# EAGLE board BrainSide (EAGLE 6.5.0)
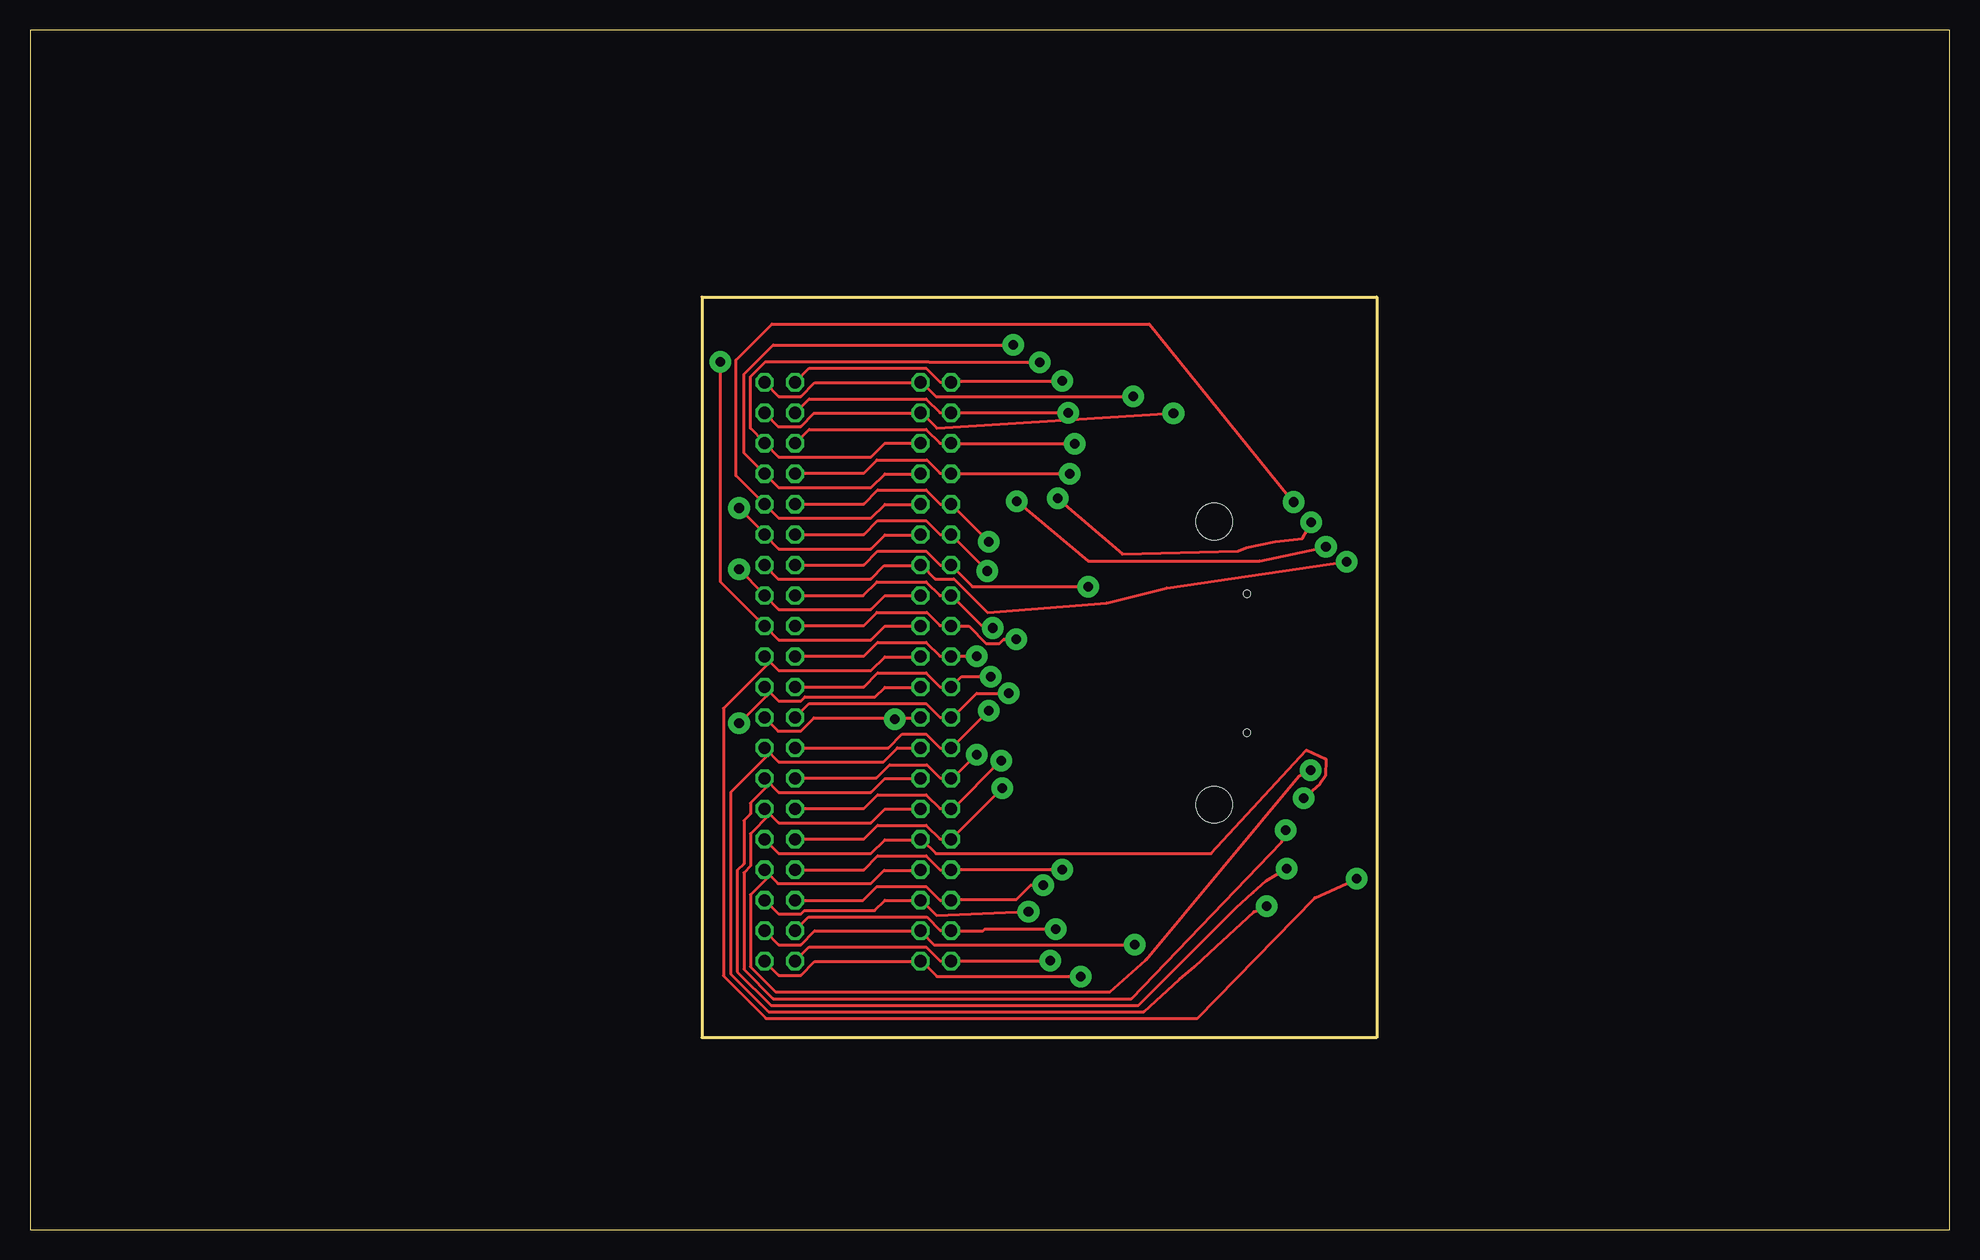
[diagram p0: board, top side]
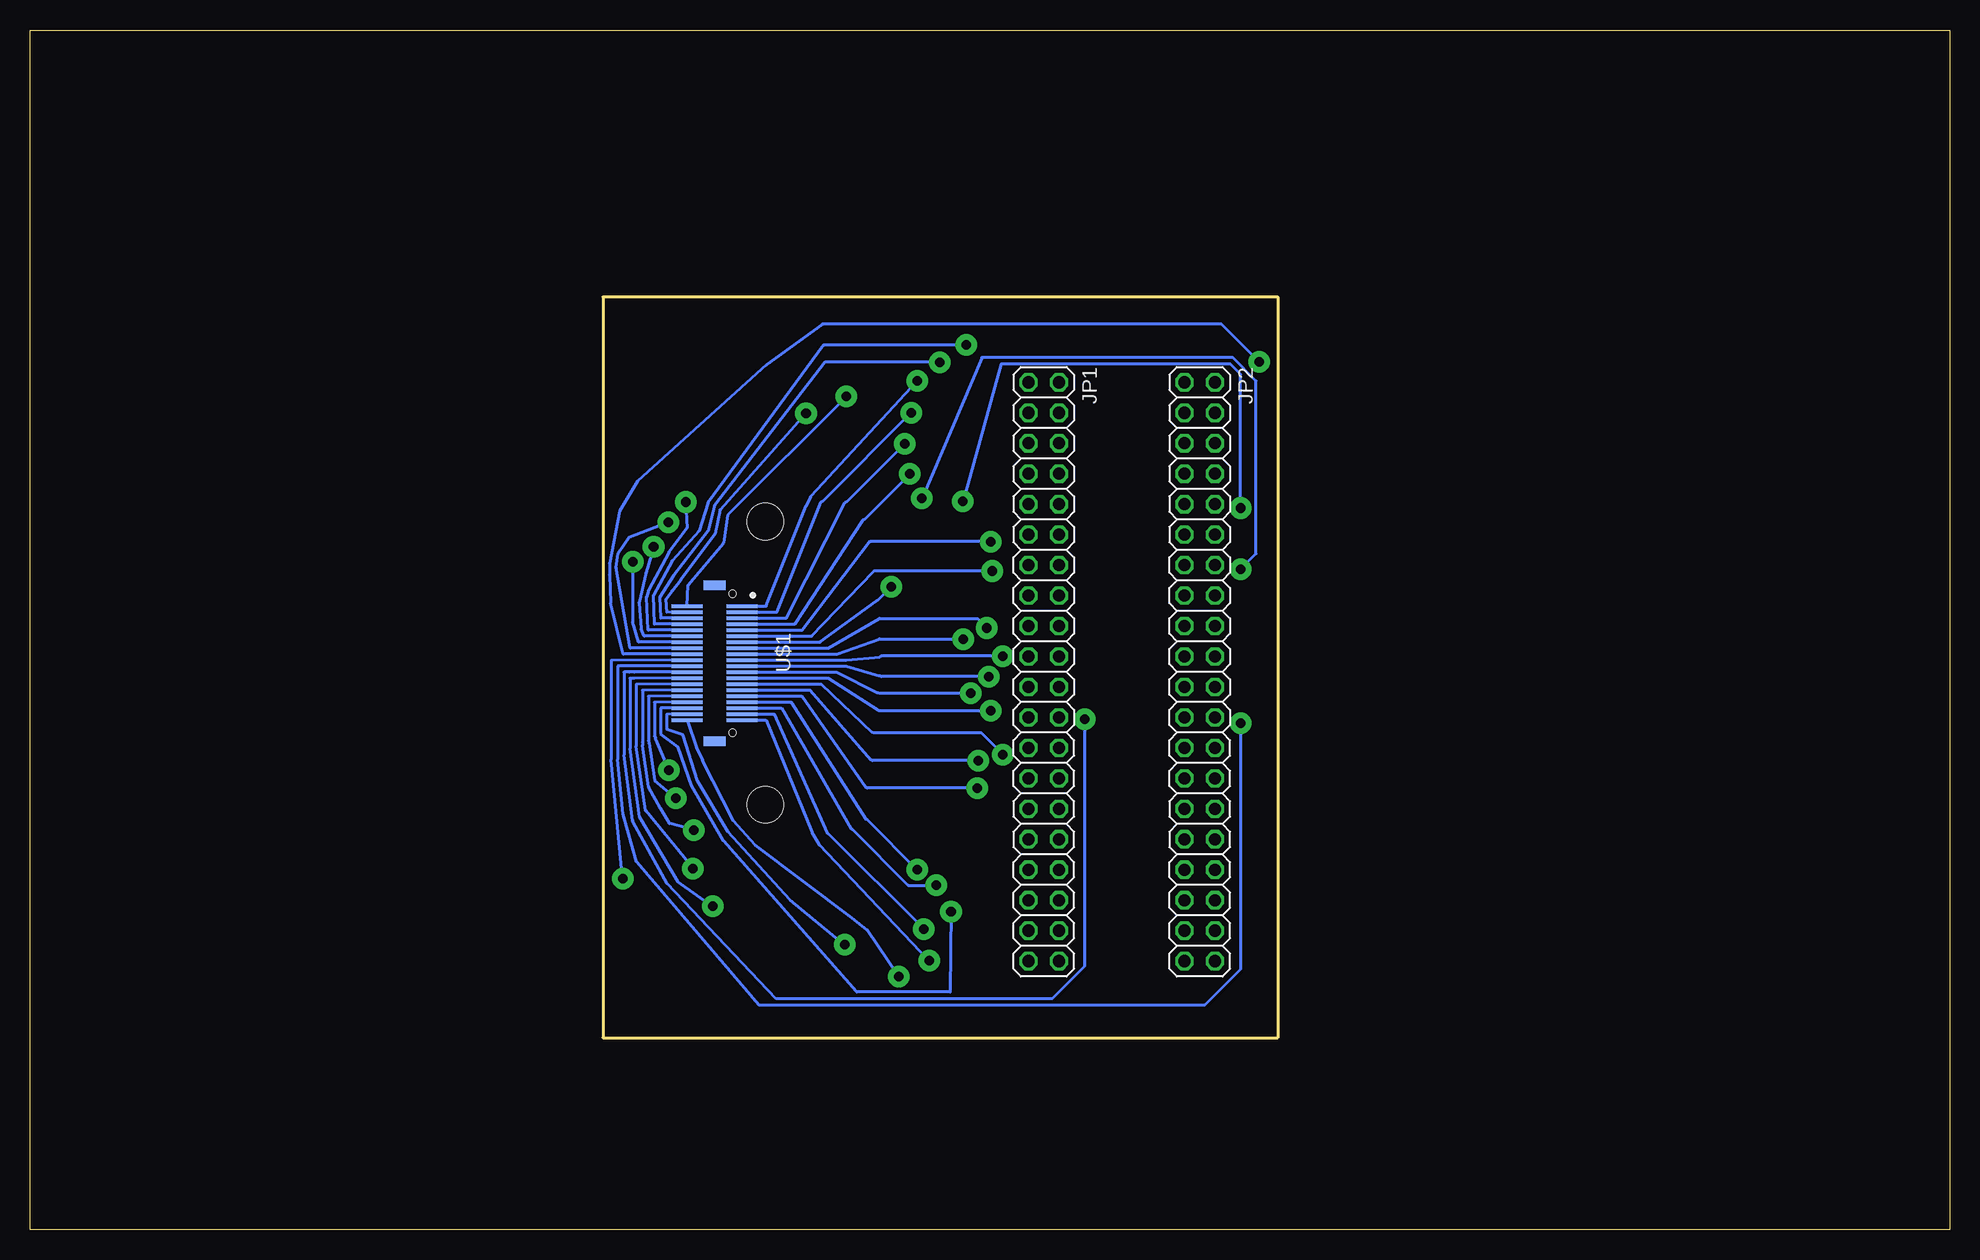
[diagram p1: board, bottom side, seen from below]

Size 160 x 100 mm. Coordinates in mm from the lower left corner, seen from the top.
Outline: 0,0 160,0 160,100 0,100 0,0
Outline: 56,77.75 56,16 112.25,16 112.25,77.75 56,77.75
Copper layers (1*16): Top 0.035mm / dielectric 1.5mm / Bottom 0.035mm
Design rules "default *": minimum track width 10mil, minimum drill 0.8mm, track to track 0.25mm, track to pad 0.25mm, pad to pad 0.25mm, via to via 0.25mm, smd to smd 0.25mm, copper to edge 40mil, drill to drill 8mil, minimum pad ring 10mil, minimum via ring 0.5mm, stop-mask expansion 4mil, vias tented up to drill 0mil, thermal gap 10mil
bRestrict: area 60,21 to 65,72; area 73,21.2 to 78,71.8

## Footprints (pad centres in the part's own frame; a part is rotated, then mirrored left to right if it is on the bottom)
2X20 = drill 1.016 octagon: 1 -24.13,-1.27; 2 -24.13,1.27; 3 -21.59,-1.27; 4 -21.59,1.27; 5 -19.05,-1.27; 6 -19.05,1.27; 7 -16.51,-1.27; 8 -16.51,1.27; 9 -13.97,-1.27; 10 -13.97,1.27; 11 -11.43,-1.27; 12 -11.43,1.27; 13 -8.89,-1.27; 14 -8.89,1.27; 15 -6.35,-1.27; 16 -6.35,1.27; 17 -3.81,-1.27; 18 -3.81,1.27; 19 -1.27,-1.27; 20 -1.27,1.27; 21 1.27,-1.27; 22 1.27,1.27; 23 3.81,-1.27; 24 3.81,1.27; 25 6.35,-1.27; 26 6.35,1.27; 27 8.89,-1.27; 28 8.89,1.27; 29 11.43,-1.27; 30 11.43,1.27; 31 13.97,-1.27; 32 13.97,1.27; 33 16.51,-1.27; 34 16.51,1.27; 35 19.05,-1.27; 36 19.05,1.27; 37 21.59,-1.27; 38 21.59,1.27; 39 24.13,-1.27; 40 24.13,1.27
DF12_F = smd 0.3 x 2.6: P$1 -4.75,2.3; P$2 -4.75,-2.3; P$3 -4.25,2.3; P$4 -4.25,-2.3; P$5 -3.75,2.3; P$6 -3.75,-2.3; P$7 -3.25,2.3; P$8 -3.25,-2.3; P$9 -2.75,2.3; P$10 -2.75,-2.3; P$11 -2.25,2.3; P$12 -2.25,-2.3; P$13 -1.75,2.3; P$14 -1.75,-2.3; P$15 -1.25,2.3; P$16 -1.25,-2.3; P$17 -0.75,2.3; P$18 -0.75,-2.3; P$19 -0.25,2.3; P$20 -0.25,-2.3; P$21 0.25,2.3; P$22 0.25,-2.3; P$23 0.75,2.3; P$24 0.75,-2.3; P$25 1.25,2.3; P$26 1.25,-2.3; P$27 1.75,2.3; P$28 1.75,-2.3; P$29 2.25,2.3; P$30 2.25,-2.3; P$31 2.75,2.3; P$32 2.75,-2.3; P$33 3.25,2.3; P$34 3.25,-2.3; P$35 3.75,2.3; P$36 3.75,-2.3; P$37 4.25,2.3; P$38 4.25,-2.3; P$39 4.75,2.3; P$40 4.75,-2.3 | smd 0.8 x 1.8: P$41 -6.5,0; P$42 6.5,0 | hole 0.6: -5.8,1.5; 5.8,1.5 | hole 3.048: -11.8,4.24; 11.8,4.24

## Placement (x,y rotation side)
JP1  [2X20]  75.5,46.5 270 bottom
JP2  [2X20]  62.5,46.5 270 bottom
U$1  DF12_F  [DF12_F]  102.94,47.21 270 bottom

## Library data of the parts
JP1 JP2 = pinhead
U$1 = KW2

## Nets
N$1: JP1.39 JP2.39 U$1.P$39
N$2: JP1.37 JP2.37 U$1.P$37
N$3: JP1.35 JP2.35 U$1.P$35
N$4: JP1.33 JP2.33 U$1.P$33
N$5: JP1.31 JP2.31 U$1.P$31
N$6: JP1.29 JP2.29 U$1.P$29
N$7: JP1.27 JP2.27 U$1.P$27
N$8: JP1.25 JP2.25 U$1.P$25
N$9: JP1.23 JP2.23 U$1.P$23
N$10: JP1.21 JP2.21 U$1.P$21
N$11: JP1.19 JP2.19 U$1.P$19
N$12: JP1.17 JP2.17 U$1.P$17
N$13: JP1.15 JP2.15 U$1.P$15
N$14: JP1.13 JP2.13 U$1.P$13
N$15: JP1.11 JP2.11 U$1.P$11
N$16: JP1.9 JP2.9 U$1.P$9
N$17: JP1.7 JP2.7 U$1.P$7
N$18: JP1.5 JP2.5 U$1.P$5
N$19: JP1.3 JP2.3 U$1.P$3
N$20: JP1.1 JP2.1 U$1.P$1
N$21: JP1.2 JP2.2 U$1.P$2
N$22: JP1.4 JP2.4 U$1.P$4
N$23: JP1.6 JP2.6 U$1.P$6
N$24: JP1.8 JP2.8 U$1.P$8
N$25: JP1.10 JP2.10 U$1.P$10
N$26: JP1.12 JP2.12 U$1.P$12
N$27: JP1.14 JP2.14 U$1.P$14
N$28: JP1.16 JP2.16 U$1.P$16
N$29: JP1.18 JP2.18 U$1.P$18
N$30: JP1.20 JP2.20 U$1.P$20
N$31: JP1.22 JP2.22 U$1.P$22
N$32: JP1.24 JP2.24 U$1.P$24
N$33: JP1.26 JP2.26 U$1.P$26
N$34: JP1.28 JP2.28 U$1.P$28
N$35: JP1.30 JP2.30 U$1.P$30
N$36: JP1.32 JP2.32 U$1.P$32
N$37: JP1.34 JP2.34 U$1.P$34
N$38: JP1.36 JP2.36 U$1.P$36
N$39: JP1.38 JP2.38 U$1.P$38
N$40: JP1.40 JP2.40 U$1.P$40

## Tracks (layer width: path | path; a pad name or v marks a point on that pad's centre or on a via)
N$1  (via drill 0.8)
  Top 0.254: JP2.39 64.95,23.55 74.7,23.55 75.85,22.4 76.75,22.4 JP1.39 76.9,22.4 v85.05,22.4
  Bottom 0.254: U$1.P$39 98.66,42.46 94.8,33.1 94.2,32.05 v85.05,22.4
N$2  (via drill 0.8)
  Top 0.254: JP2.37 63.8,24.95 64.9,26.05 74.75,26.05 75.85,24.95 76.75,24.95 JP1.37 76.9,24.9 79.45,24.9 79.6,25.05 v85.5,25.05
  Bottom 0.254: U$1.P$37 97.96,42.96 93.55,33.05 93.45,33 v85.5,25.05
N$3  (via drill 0.8)
  Top 0.254: JP2.35 69.45,27.45 70.6,28.6 74.7,28.6 75.85,27.45 JP1.35 76.85,27.5 82.2,27.5 83.4,28.7 v84.45,28.7
  Bottom 0.254: U$1.P$35 97.36,43.46 91.55,33.4 91.45,33.35 86.8,28.7 v84.45,28.7
N$4  (via drill 0.8)
  Top 0.254: JP2.33 63.8,30 69.5,30 70.65,31.15 74.7,31.15 75.85,30 76.75,30 JP1.33 76.9,30 v86.05,30
  Bottom 0.254: U$1.P$33 96.56,43.96 90.3,34.2 90.2,34.15 v86.05,30
N$5  (via drill 0.8)
  Top 0.254: JP2.31 63.8,32.55 69.5,32.55 70.65,33.7 74.7,33.7 75.85,32.55 76.75,32.55 JP1.31 76.85,32.6 v81.05,36.8
  Bottom 0.254: U$1.P$31 95.66,44.46 90.3,36.85 90.2,36.8 v81.05,36.8
N$6  (via drill 0.8)
  Top 0.254: JP2.29 63.8,35.1 69.5,35.1 70.65,36.25 74.7,36.25 75.85,35.1 76.75,35.1 JP1.29 76.85,35 v80.95,39.1
  Bottom 0.254: U$1.P$29 94.96,44.96 89.9,39.15 89.8,39.1 v80.95,39.1
N$7  (via drill 0.8)
  Top 0.254: JP2.27 63.8,37.65 70.55,37.65 71.65,38.75 74.75,38.75 75.85,37.65 76.75,37.65 JP1.27 76.9,37.6 v78.9,39.6
  Bottom 0.254: U$1.P$27 94.06,45.46 89.8,41.45 89.7,41.4 80.7,41.4 v78.9,39.6
N$8  (via drill 0.8)
  Top 0.254: JP2.25 71.55,40.15 72.7,41.3 74.7,41.3 75.85,40.15 JP1.25 76.85,40.2 v79.9,43.25
  Bottom 0.254: U$1.P$25 93.46,45.96 89.3,43.3 89.2,43.25 v79.9,43.25
N$9  (via drill 0.8)
  Top 0.254: JP2.23 63.8,42.7 64.95,43.85 74.7,43.85 75.85,42.7 76.75,42.7 JP1.23 76.9,42.7 78.9,44.7 v81.6,44.7
  Bottom 0.254: U$1.P$23 92.76,46.46 89.3,44.75 89.2,44.7 v81.6,44.7
N$10  (via drill 0.8)
  Top 0.254: JP2.21 63.8,45.25 69.5,45.25 70.65,46.4 74.7,46.4 75.85,45.25 76.75,45.25 JP1.21 76.85,45.3 77.65,46.1 v80.1,46.1
  Bottom 0.254: U$1.P$21 91.96,46.96 89.15,46.15 89.05,46.1 v80.1,46.1
N$11  (via drill 0.8)
  Top 0.254: JP2.19 63.8,47.8 69.5,47.8 70.65,48.95 74.7,48.95 75.85,47.8 76.75,47.8 JP1.19 76.9,47.8 v78.9,47.8
  Bottom 0.254: U$1.P$19 91.94,47.46 89.15,47.75 89.05,47.8 v78.9,47.8
N$12  (via drill 0.8)
  Top 0.254: JP2.17 63.8,50.35 69.5,50.35 70.6,51.45 74.75,51.45 75.85,50.35 76.75,50.35 JP1.17 76.9,50.3 78.25,50.3 79.7,48.85 80.8,48.85 81.15,49.2 v82.2,49.2
  Bottom 0.254: U$1.P$17 92.74,47.96 89.2,49.25 89.1,49.2 v82.2,49.2
N$13  (via drill 0.8)
  Top 0.254: JP2.15 69.45,52.85 70.6,54 74.7,54 75.85,52.85 JP1.15 76.85,52.8 79.5,50.15 v80.25,50.15
  Bottom 0.254: U$1.P$15 93.44,48.46 89.2,50.95 89.1,50.9 81,50.9 v80.25,50.15
N$14  (via drill 0.8)
  Top 0.254: JP2.13 63.8,55.4 69.5,55.4 70.65,56.55 74.7,56.55 75.85,55.4 76.75,55.4 JP1.13 76.85,55.3 78.55,53.6 v88.2,53.6
  Bottom 0.254: U$1.P$13 94.14,48.96 89.45,52.4 89.35,52.45 v88.2,53.6
N$15  (via drill 0.8)
  Top 0.254: JP2.11 63.8,57.95 69.5,57.95 70.65,59.1 74.7,59.1 75.85,57.95 76.75,57.95 JP1.11 v79.8,54.9
  Bottom 0.254: U$1.P$11 94.84,49.46 89.7,54.85 89.6,54.9 v79.8,54.9
N$16  (via drill 0.8)
  Top 0.254: JP2.9 63.8,60.5 69.5,60.5 70.65,61.65 74.7,61.65 75.85,60.5 76.75,60.5 JP1.9 76.85,60.4 v79.9,57.35
  Bottom 0.254: U$1.P$9 95.64,49.96 90.05,57.3 89.95,57.35 v79.9,57.35
N$17  (via drill 0.8)
  Top 0.254: JP2.7 63.8,63.05 69.5,63.05 70.6,64.15 74.75,64.15 75.85,63.05 76.75,63.05 JP1.7 76.9,63 v86.65,63
  Bottom 0.254: U$1.P$7 96.24,50.46 90.55,59.15 90.45,59.2 v86.65,63
N$18  (via drill 0.8)
  Top 0.254: JP2.5 63.8,65.55 64.95,66.7 74.7,66.7 75.85,65.55 JP1.5 76.85,65.5 v87.1,65.5
  Bottom 0.254: U$1.P$5 96.94,50.96 92.05,60.6 91.95,60.65 v87.1,65.5
N$19  (via drill 0.8)
  Top 0.254: JP2.3 63.8,68.1 64.95,69.25 74.7,69.25 75.85,68.1 76.75,68.1 JP1.3 76.9,68.1 v86.55,68.1
  Bottom 0.254: U$1.P$3 97.74,51.46 94.05,60.65 93.95,60.7 v86.55,68.1
N$20  (via drill 0.8)
  Top 0.254: JP2.1 63.8,70.65 64.95,71.8 74.7,71.8 75.85,70.65 76.75,70.65 JP1.1 76.8,70.75 v86.05,70.75
  Bottom 0.254: U$1.P$1 98.64,51.96 95.3,60.3 94.95,61.1 v86.05,70.75
N$21  (via drill 0.8)
  Top 0.254: JP2.2 61.25,70.6 62.4,69.45 64.25,69.45 65.4,70.6 74.2,70.6 JP1.2 74.35,70.6 75.5,69.45 v91.95,69.45
  Bottom 0.254: U$1.P$2 105.16,53.71 102.2,57.25 101.85,59.55 v91.95,69.45
N$22  (via drill 0.8)
  Top 0.254: JP2.4 61.25,68.05 62.35,66.95 64.25,66.95 65.35,68.05 74.2,68.05 JP1.4 74.35,68.05 75.6,66.8 v95.31,68.04
  Bottom 0.254: U$1.P$4 106.91,51.44 106.97,52.58 106.5,53.25 105.75,54.2 102.9,58 102.5,60 v95.31,68.04
N$23  (via drill 0.8)
  Top 0.254: JP1.6 71.25,65.55 70.1,64.4 62.4,64.4 61.25,65.55 JP2.6 61.2,65.65 60.05,66.8 60.05,71.1 61.3,72.35 74.9,72.35 74.95,72.3 v84.15,72.3
  Bottom 0.254: U$1.P$6 107.4,50.96 107.49,52.74 106.32,54.56 103.5,58.25 102.95,60.35 93.75,72.3 v84.15,72.3
N$24  (via drill 0.8)
  Top 0.254: JP1.8 74.2,63 71.25,63 70.1,61.85 62.4,61.85 61.25,63 JP2.8 61.15,63.1 59.5,64.75 59.5,71.3 61.95,73.75 v81.95,73.75
  Bottom 0.254: U$1.P$8 107.94,50.47 108.03,52.88 106.5,55.75 104.25,58.25 103.5,60.6 93.85,73.75 v81.95,73.75
N$25  (via drill 0.8)
  Top 0.254: JP1.10 74.2,60.45 71.25,60.45 70.1,59.3 62.4,59.3 JP2.10 58.85,62.85 58.85,72.5 61.85,75.5 93.3,75.5 104.9,61.15 v105.35,60.65
  Bottom 0.254: U$1.P$10 108.46,49.96 108.61,52.74 108.45,53.3 106.75,56.5 105.25,58.5 v105.35,60.65
N$26  (via drill 0.8)
  Top 0.254: JP1.12 74.2,57.9 71.25,57.9 70.1,56.75 62.4,56.75 61.25,57.9 JP2.12 61.2,58.05 v59.1,60.15 | v108.02,56.9 102.5,55.75 88.2,55.75 v82.25,60.7
  Bottom 0.254: U$1.P$12 108.81,49.46 109.05,50.09 109.25,52.25 108.65,54.76 v108.02,56.9 | v82.25,60.7 79.05,72.15 59.95,72.15 59.1,71.3 v59.1,60.15
N$27  (via drill 0.8)
  Top 0.254: JP2.14 61.25,55.35 62.35,54.25 70.1,54.25 71.2,55.35 74.2,55.35 JP1.14 74.35,55.35 75.45,54.25 77,54.25 79.8,51.45 89.75,52.25 94.75,53.5 v109.76,55.67
  Bottom 0.254: U$1.P$14 109.26,48.96 109.76,50.69 v109.76,55.67
N$28  (via drill 0.8)
  Top 0.254: JP1.16 71.25,52.85 70.1,51.7 62.4,51.7 61.25,52.85 JP2.16 61.2,52.95 v59.1,55.05 | v106.8,58.95 106.05,57.6 103.8,57.35 101.4,56.85 100.7,56.55 91.05,56.3 v85.65,60.95
  Bottom 0.254: U$1.P$16 109.96,48.46 111.13,55.18 111,56.34 110.05,57.7 v106.8,58.95 | v85.65,60.95 80.65,72.7 59.75,72.7 57.8,70.75 57.8,56.35 v59.1,55.05
N$29  (via drill 0.8)
  Top 0.254: JP1.18 74.2,50.3 71.25,50.3 70.1,49.15 62.4,49.15 61.25,50.3 JP2.18 61.15,50.4 57.55,54 v57.55,72.35
  Bottom 0.254: U$1.P$18 110.56,47.96 111.6,52.25 111.7,54.57 111.71,55.53 110.85,59.9 109.35,62.4 98.6,72.1 93.95,75.5 60.7,75.5 v57.55,72.35
N$30  (via drill 0.8)
  Top 0.254: JP1.20 74.2,47.75 71.25,47.75 70.1,46.6 62.4,46.6 JP2.20 61.6,47.25 57.8,43.45 57.8,21.15 61.35,17.6 97.3,17.6 107.1,27.65 v110.6,29.25
  Bottom 0.254: U$1.P$20 111.55,47.45 111.55,39.19 v110.6,29.25
N$31  (via drill 0.8)
  Top 0.254: JP1.22 74.2,45.2 71.25,45.2 70.45,44.4 64.6,44.4 64.25,44.05 62.4,44.05 61.25,45.2 JP2.22 61.6,44.7 v59.1,42.2
  Bottom 0.254: U$1.P$22 111.01,46.96 111.01,39.2 110.58,34.63 109.45,30.65 99.25,18.7 62.1,18.7 59.1,21.7 v59.1,42.2
N$32  (via drill 0.8)
  Top 0.254: 72.1,42.65 65.35,42.65 64.25,41.55 62.35,41.55 61.25,42.65 JP2.24 | 72.1,42.65 74.2,42.65 JP1.24 | v72.1,42.55 72.1,42.65
  Bottom 0.254: U$1.P$24 109.64,46.46 110.03,46.46 110.5,46.46 110.5,39.55 109.76,34.11 109.75,34 106.9,28.85 97.8,19.25 74.8,19.25 72.1,21.95 v72.1,42.55
N$33  (via drill 0.8)
  Top 0.254: JP1.26 72.3,40.15 71.15,39 62.4,39 61.25,40.15 JP2.26 61.6,39.65 58.4,36.45 58.4,21.3 61.55,18.15 92.85,18.15 95.8,20.85 97.05,21.9 98.35,23.1 102,26.5 v103.1,26.95
  Bottom 0.254: U$1.P$26 109.64,45.95 109.98,45.95 109.98,40.1 109.18,34.38 106,29 v103.1,26.95
N$34  (via drill 0.8)
  Top 0.254: JP1.28 74.2,37.6 71.25,37.6 70.1,36.45 62.4,36.45 61.25,37.6 JP2.28 61.6,37.1 60.05,35.55 60.05,34.65 59.5,34.1 59.5,30.5 58.95,29.95 58.95,21.5 61.75,18.7 92.4,18.7 100.5,26.8 101.95,28.1 103,29.05 v104.75,30.1
  Bottom 0.254: U$1.P$28 109.46,45.46 109.46,40.29 108.69,34.92 v104.75,30.1
N$35  (via drill 0.8)
  Top 0.254: JP1.30 74.2,35.05 71.25,35.05 70.1,33.9 62.4,33.9 JP2.30 61.6,34.55 60.05,33 60.05,30.3 59.5,29.75 59.5,21.7 61.95,19.25 91.8,19.25 104.35,32.3 v104.65,33.3
  Bottom 0.254: U$1.P$30 108.96,44.95 108.96,40.62 108.94,40.36 108.42,36.92 107.43,35.09 106.7,33.85 v104.65,33.3
N$36  (via drill 0.8)
  Top 0.254: JP2.32 61.25,32.5 62.4,31.35 70.1,31.35 71.25,32.5 74.2,32.5 JP1.32 74.35,32.5 75.5,31.35 98.45,31.35 106.39,39.98 108,39.25 108,37.82 107.5,37.12 v106.15,35.95
  Bottom 0.254: U$1.P$32 108.45,44.46 108.45,40.73 108.4,40.55 107.93,37.45 v106.15,35.95
N$37  (via drill 0.8)
  Top 0.254: JP1.34 74.2,29.95 71.2,29.95 70.1,28.85 62.35,28.85 61.25,29.95 JP2.34 61.6,29.45 60.05,27.9 60.05,21.9 62.15,19.8 90,19.8 93,22.5 105.75,37.8 v106.75,38.3
  Bottom 0.254: U$1.P$34 107.94,43.95 107.94,41.12 107.87,40.95 v106.75,38.3
N$38  (via drill 0.8)
  Top 0.254: JP2.36 61.25,27.45 62.4,26.3 64.25,26.3 64.55,26.6 70.4,26.6 71.25,27.45 JP1.36 74.35,27.4 75.55,26.2 v83.23,26.52
  Bottom 0.254: U$1.P$36 107.43,43.46 107.43,41.33 106,40.25 104.86,37 102.2,32.4 91.1,19.8 83.3,19.8 v83.23,26.52
N$39  (via drill 0.8)
  Top 0.254: JP2.38 61.25,24.9 62.4,23.75 64.25,23.75 65.4,24.9 74.2,24.9 JP1.38 74.3,24.8 75.35,23.75 v92.1,23.75
  Bottom 0.254: U$1.P$38 106.88,42.95 106.92,42.95 106.92,41.69 105.57,41.22 104.35,37.4 101.8,33.15 96.65,27.5 v92.1,23.75
N$40  (via drill 0.8)
  Top 0.254: JP2.40 62.4,21.2 64.25,21.2 65.4,22.35 74.2,22.35 JP1.40 74.35,22.35 75.6,21.1 v87.6,21.1
  Bottom 0.254: U$1.P$40 104.45,40.15 103.95,39.1 101.35,34.05 99.55,32.05 91.5,26 90.25,25 v87.6,21.1